# Altium PCB tyre_temps.PcbDoc
Units mm, origin at the board's own origin, x right, y up, seen from the top; angles counter-clockwise.
Board outline 19.3 x 107.95 mm, 2 copper layers (Component Side, Bottom Layer), stack 0.325 mm thick; 21 components, 20 nets, 123 pads, 39 vias.
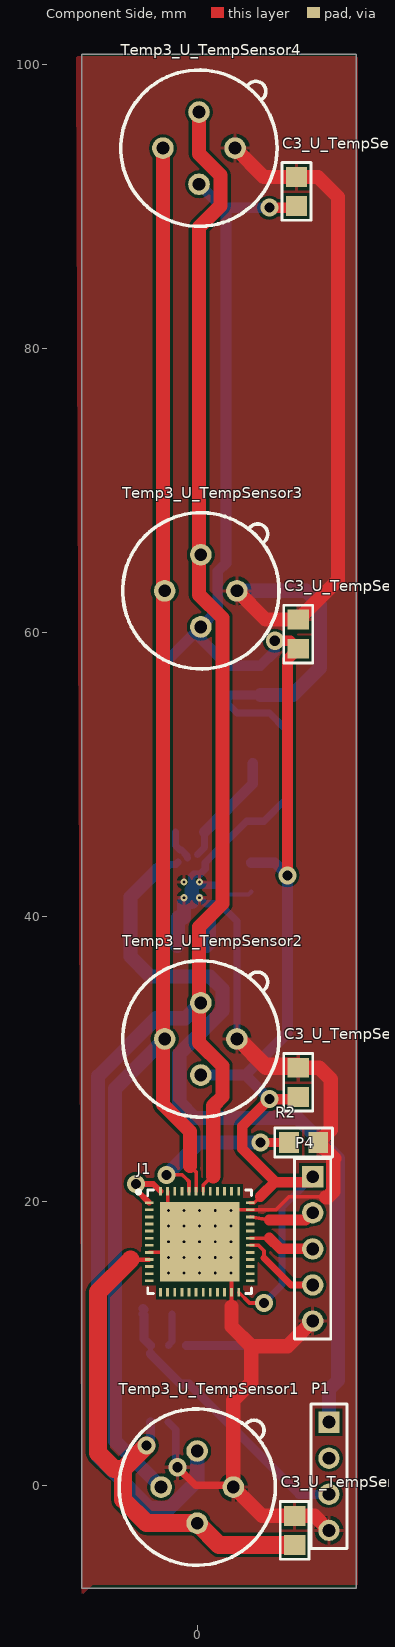
[diagram p0: Component Side view]
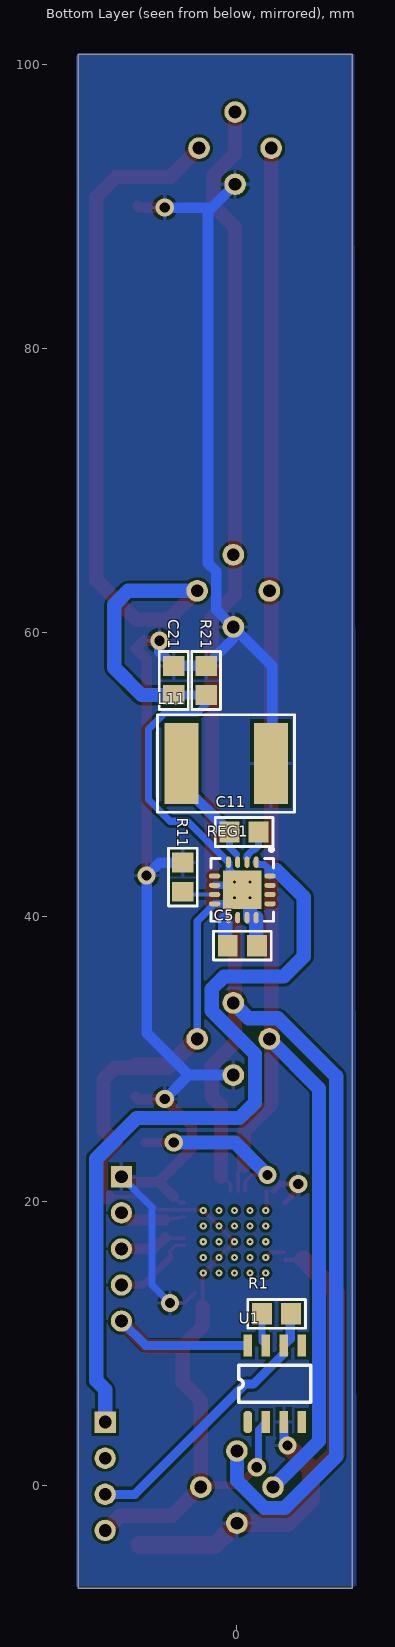
[diagram p1: Bottom Layer view, seen from below]

## Layer stack, top to bottom
Top Solder: solder mask 0.0102, Solder Resist, Dk 3.5
Component Side: signal copper 0.0356
Dielectric 1: core 0.254, FR-4, Dk 4.2
Bottom Layer: signal copper 0.0356
Solder Side: solder mask 0.0102, Solder Resist, Dk 3.5

## Board outline
-8.128,-7.239 11.176,-7.239 11.176,100.711 -8.128,100.711

## Design rules (kind name [scope] priority, off if disabled: settings)
Clearance [All] p1: gap=0.2
PolygonConnect [All] p1: connectstyle=Relief reliefconductorwidth=0.254 reliefentries=4 polygonreliefangle="90 Angle" airgapwidth=0.254
RoomDefinition U_CanTranceiver [InComponentClass('U_CanTranceiver')] p1: confinementstyle=ConfineIn formatcopy=TRUE lockcomponents=FALSE outline 0.127,14.215 0.127,3.429 -8.001,3.429 -8.001,14.215
RoomDefinition "U_Buck Converter" [InComponentClass('U_Buck Converter')] p2: confinementstyle=ConfineIn formatcopy=TRUE lockcomponents=FALSE outline 6.985,61.214 6.985,36.576 -5.715,36.576 -5.715,61.214
RoomDefinition U_TempSensor4 [InComponentClass('U_TempSensor4')] p3: confinementstyle=ConfineIn formatcopy=TRUE lockcomponents=FALSE outline -5.969,88.138 8.509,88.138 8.509,102.87 -5.969,102.87
RoomDefinition U_TempSensor3 [InComponentClass('U_TempSensor3')] p4: confinementstyle=ConfineIn formatcopy=TRUE lockcomponents=FALSE outline -5.842,57.023 8.636,57.023 8.636,71.755 -5.842,71.755
RoomDefinition U_TempSensor2 [InComponentClass('U_TempSensor2')] p5: confinementstyle=ConfineIn formatcopy=TRUE lockcomponents=FALSE outline -5.842,25.527 8.636,25.527 8.636,40.259 -5.842,40.259
RoomDefinition U_TempSensor1 [InComponentClass('U_TempSensor1')] p6: confinementstyle=ConfineIn formatcopy=TRUE lockcomponents=FALSE outline -6.096,-5.969 8.382,-5.969 8.382,8.763 -6.096,8.763
RoomDefinition U_Micro [InComponentClass('U_Micro')] p7: confinementstyle=ConfineIn formatcopy=TRUE lockcomponents=FALSE outline -8.846,8.249 10.077,8.249 10.077,25.4 -8.846,25.4
RoomDefinition "Top Level" [InComponentClass('Top Level')] p8: confinementstyle=ConfineIn formatcopy=TRUE lockcomponents=FALSE outline 10.668,7.62 7.62,7.62 7.62,-5.588 10.668,-5.588
RoutingVias [All] p1: holewidth=0.711 width=1.27 viastyle="Through Hole" minholewidth=0.711 minwidth=1.27 maxholewidth=0.711 maxwidth=1.27
SolderMaskExpansion [All] p1: expansion=0.102
Width [All] p1: maxlimit=2 minlimit=0.254 preferedwidth=1
30 further rules are at their usual default settings.

## Classes and differential pairs
component class "Top Level": P1
component class "U_Buck Converter": C5 C11 C21 L11 R11 R21 REG1
component class U_CanTranceiver: R1 U1
component class U_Micro: J1 P4 R2
component class U_TempSensor1: C3_U_TempSensor1 Temp3_U_TempSensor1
component class U_TempSensor2: C3_U_TempSensor2 Temp3_U_TempSensor2
component class U_TempSensor3: C3_U_TempSensor3 Temp3_U_TempSensor3
component class U_TempSensor4: C3_U_TempSensor4 Temp3_U_TempSensor4
channel class TempSensor: U_TempSensor1 U_TempSensor2 U_TempSensor3 U_TempSensor4

## Components (designator, comment, footprint, x,y, rotation, side; value= is the part's Value field where it differs from the comment)
C3_U_TempSensor1 "Cap" R0805 6.858,-3.175 r90 top (schematic designator C3)
C3_U_TempSensor2 "Cap" R0805 7.112,28.363 r90 top (schematic designator C3)
C3_U_TempSensor3 "Cap" R0805 7.112,59.902 r90 top (schematic designator C3)
C3_U_TempSensor4 "Cap" R0805 6.985,91.059 r90 top (schematic designator C3)
C5 "Cap" R0805 -0.381,37.973 r180 bottom
C11 "Cap" R0805 -0.508,45.974 r0 bottom
C21 "Cap" R0805 4.445,56.642 r90 bottom
J1 "STM32F072CBU6" "STM32F072CBU6 - duplicate" 0.171,17.139 r0 top
L11 "Inductor" INDUCTOR 0.762,50.8 r180 bottom
P1 "Header 4" HDR1X4 9.271,4.445 r270 top
P4 "Header 5" HDR1X5 8.128,21.717 r270 top
R1 "Res3" R0805 -2.794,12.065 r0 bottom
R2 "Res3" R0805 7.493,24.13 r0 top
R11 "Res3" R0805 3.81,42.799 r270 bottom
R21 "Res3" R0805 2.159,56.642 r90 bottom
REG1 "TPS54395" TPS54395 -0.381,41.901 r270 bottom
Temp3_U_TempSensor1 "Component_1" MLX90614 0,-0.127 r90 top (schematic designator Temp3)
Temp3_U_TempSensor2 "Component_1" MLX90614 0.254,31.411 r90 top (schematic designator Temp3)
Temp3_U_TempSensor3 "Component_1" MLX90614 0.254,62.95 r90 top (schematic designator Temp3)
Temp3_U_TempSensor4 "Component_1" MLX90614 0.127,94.107 r90 top (schematic designator Temp3)
U1 "CAN TRANCEIVER" SOP8 -0.762,4.445 r270 bottom

## Footprints (in the part's own frame and the unit in brackets; to place one, negate y for a bottom-side part, rotate by r counter-clockwise, add the part's x,y. Pads: shape width x height; smd on the part's side, far side on the other; paste and mask are expansions set on the pad)
HDR1X4 [mm] "Connector; Header; 4 Position"
  rect 1.5x1.5 hole 0.9: 1(0,0)
  round 1.5 hole 0.9: 2(2.54,0) 3(5.08,0) 4(7.62,0)
  silkscreen extent -1.27,-1.27 8.89,1.27
HDR1X5 [mm] "Connector; Header; 5 Position"
  rect 1.5x1.5 hole 0.9: 1(0,0)
  round 1.5 hole 0.9: 2(2.54,0) 3(5.08,0) 4(7.62,0) 5(10.16,0)
  silkscreen extent -1.27,-1.27 11.43,1.27
INDUCTOR [mm]
  rect 2.4x5.7 smd: 1(3.15,0) 2(-3.15,0)
  silkscreen extent -4.83,-3.43 4.83,3.43, body extent -3.15,-3.15 3.15,3.15, height 4.5
MLX90614 [mil]
  round 60 hole 35.43: 0(0,100) 1(100,0) 2(0,-100) 3(-100,0)
  silkscreen extent -216,-217 216,216
R0805 [mm]
  rect 1.4x1.5 smd: 1(-1.025,0) 2(1.025,0)
  silkscreen extent -2.03,-1.02 2.03,1.02, body extent -1.4,-0.76 1.4,0.76, height 1
SOP8 [mm]
  oct 1.55x0.6 smd: 1(0,0)
  rect 1.55x0.6 smd: 2(0,1.27) 3(0,2.54) 4(0,3.81) 5(-5.4,3.81) 6(-5.4,2.54) 7(-5.4,1.27) 8(-5.4,0)
  silkscreen extent -4,-0.63 -1.4,4.45, body extent -4.62,-0.62 -0.62,4.38, height 1.75
"STM32F072CBU6 - duplicate" [mm] "STMicroelectronics STM32F072CBU6, 32bit ARM Cortex M0 Microcontroller, 48MHz, 64 kB, 128 kB Flash, 48-Pin UFQFPN"
  rect 0.6x0.2 smd: 1(-3.55,2.75) 2(-3.55,2.25) 3(-3.55,1.75) 4(-3.55,1.25) 5(-3.55,0.75) 6(-3.55,0.25) 7(-3.55,-0.25) 8(-3.55,-0.75) 9(-3.55,-1.25) 10(-3.55,-1.75) 11(-3.55,-2.25) 12(-3.55,-2.75) 25(3.55,-2.75) 26(3.55,-2.25) 27(3.55,-1.75) 28(3.55,-1.25) 29(3.55,-0.75) 30(3.55,-0.25) 31(3.55,0.25) 32(3.55,0.75) 33(3.55,1.25) 34(3.55,1.75) 35(3.55,2.25) 36(3.55,2.75)
  rect 0.2x0.6 smd: 13(-2.75,-3.55) 14(-2.25,-3.55) 15(-1.75,-3.55) 16(-1.25,-3.55) 17(-0.75,-3.55) 18(-0.25,-3.55) 19(0.25,-3.55) 20(0.75,-3.55) 21(1.25,-3.55) 22(1.75,-3.55) 23(2.25,-3.55) 24(2.75,-3.55) 37(2.75,3.55) 38(2.25,3.55) 39(1.75,3.55) 40(1.25,3.55) 41(0.75,3.55) 42(0.25,3.55) 43(-0.25,3.55) 44(-0.75,3.55) 45(-1.25,3.55) 46(-1.75,3.55) 47(-2.25,3.55) 48(-2.75,3.55)
  rect 5.6x5.6 smd: 49(0,0)
  silkscreen extent -4.42,-3.65 3.65,3.65, body extent -3.5,-3.5 3.5,3.5, height 0.55
TPS54395 [mm] "QFN, 16-Leads, Body 4.00x4.00mm, Pitch 0.65mm, Thermal Pad 2.70x2.70mm, IPC Medium Density"
  oval 0.8x0.35 smd: 1(-1.95,0.975) 2(-1.95,0.325) 3(-1.95,-0.325) 4(-1.95,-0.975) 9(1.95,-0.975) 10(1.95,-0.325) 11(1.95,0.325) 12(1.95,0.975)
  oval 0.35x0.8 smd: 5(-0.975,-1.95) 6(-0.325,-1.95) 7(0.325,-1.95) 8(0.975,-1.95) 13(0.975,1.95) 14(0.325,1.95) 15(-0.325,1.95) 16(-0.975,1.95)
  rect 2.7x2.7 smd: 17(0,0)
  silkscreen extent -2.97,-2.2 2.2,2.2, body extent -2.13,-2.13 2.13,2.13, height 1

## Part data
C3_U_TempSensor1 C3_U_TempSensor2 C3_U_TempSensor3 C3_U_TempSensor4 C5 C11 C21: "Capacitor"
J1: "MICROCONTROLLER"
P1: "Header, 4-Pin"
P4: "Header, 5-Pin"
R1 R2 R11 R21: "Resistor"
REG1: "Dual Channel Buck Converter"
U1: library part 595-SN65HVD233

## Via types
v1: diameter 0.5, hole 0.2, Component Side to Bottom Layer, 29 vias
v2: diameter 1.27, hole 0.711, Component Side to Bottom Layer, 10 vias

## Nets (pads, with @x,y where several pads share a name; then routed paths per layer and width w, separated by ;. In a path a pad name is that pad's centre, name@x,y a point inside that pad or via, vN(x,y) a via of type N, cw(c..) or ccw(c..) an arc to the next point about the centre after c; other vN are vias at no path point)
"CAN H": P1.2
"CAN L": P1.3 R1.1 U1.6 | length 19.2
  Bottom Layer w0.635: R1.1 -3.755,12.001 -3.755,10.298 U1.6 ; R1.1@-3.819,12.437 R1.1@-3.755,12.373 ; U1.6@-3.302,9.271 -1.143,7.112 -0.569,7.112 7.178,-0.635 P1.3
"CAN RX": U1.4
"CAN RXM": J1.33
"CAN TX": U1.1
"CAN TXM": J1.32
GND: C3_U_TempSensor1.2 C3_U_TempSensor2.2 C3_U_TempSensor3.2 C3_U_TempSensor4.2 C5.2 C21.1 J1.8 J1.23 J1.35 J1.47 J1.49 P1.4 P4.5 R2.2 R21.1 REG1.4 REG1.6 REG1.8 REG1.11 REG1.12 REG1.17 Temp3_U_TempSensor1.2 Temp3_U_TempSensor2.2 Temp3_U_TempSensor3.2 Temp3_U_TempSensor4.2 U1.2 U1.8 | length 187.8
  Component Side w0.254: J1.8 -2.379,16.389 v1(-2.029,16.039) ; J1.47 -2.079,19.389 v1(-2.029,19.339) ; 2.413,12.573 2.413,13.581 J1.23 ; J1.49@2.421,14.889 v1(2.371,14.939) v1(1.271,16.039) v1(0.171,17.139) v1(1.271,18.239) v1(2.371,19.339) 2.421,19.389 J1.35 5.546,19.389 6.477,20.32 9.017,20.32
  Component Side w0.3: J1.23 J1.49@2.421,14.889
  Component Side w0.508: v2(-1.397,1.27) -0.127,0 2.413,0 Temp3_U_TempSensor1.2
  Component Side w1: 2.413,12.573 2.413,11.176 3.81,9.779 ; Temp3_U_TempSensor4.2 4.69,92.084 C3_U_TempSensor4.2 8.5,92.084 9.906,90.678 9.906,63.721 C3_U_TempSensor3.2 4.817,60.927 Temp3_U_TempSensor3.2 ; Temp3_U_TempSensor2.2 4.817,29.388 C3_U_TempSensor2.2 8.585,29.388 9.398,28.575 9.398,25.01 R2.2 9.652,22.996 9.578,22.922 9.578,20.677 9.168,20.267 9.089,20.267 ; Temp3_U_TempSensor2.2@2.794,31.623 4.817,29.6 C3_U_TempSensor2.2@7.112,29.6 ; P4.5 6.35,9.779 3.81,9.779 ; P1.4 8.246,-2.15 C3_U_TempSensor1.2 4.563,-2.15 Temp3_U_TempSensor1.2 2.54,5.969 3.81,7.239 3.81,9.779
  Bottom Layer w0.5: REG1.6 -0.056,42.226 REG1.17 ; R21.1 2.159,54.991 2.794,54.356 5.08,54.356 6.223,53.213 6.223,48.26 4.699,46.736 3.479,46.736 REG1.4 0.569,43.826 0.569,43.367 0.203,43.001 -0.256,43.001 -0.381,42.876 REG1.17 ; Temp3_U_TempSensor2.2 2.794,39.701 REG1.8 0.594,40.926 v1(0.169,41.351) REG1.17
  Bottom Layer w0.508: U1.2 -1.516,3.929 -1.516,1.389 v2(-1.397,1.27)
  Bottom Layer w0.635: U1.8 6.416,9.845 P4.5 ; R21.1 C21.1
  Bottom Layer w1: C5.2 -1.356,38.023 REG1.12 -0.931,39.951 -0.931,41.051 -0.381,41.051 REG1.17 ; Temp3_U_TempSensor3.2 7.662,62.95 8.636,61.976 8.636,57.531 6.722,55.617 C21.1
  other v1: -2.029,14.939 -0.929,14.939 0.171,14.939 1.271,14.939 -0.929,16.039 0.171,16.039 2.371,16.039 -2.029,17.139 -0.929,17.139 1.271,17.139 2.371,17.139 -2.029,18.239 -0.929,18.239 0.171,18.239 2.371,18.239 -0.929,19.339 0.171,19.339 1.271,19.339 -0.931,41.351 -0.931,42.451 0.169,42.451
NetC5_1: C5.1 REG1.9 | length 2
  Bottom Layer w1: C5.1 0.819,38.148 0.819,39.851
NetC11_1: C11.1 REG1.2 | length 2.2
  Bottom Layer w0.5: C11.1 -1.533,45.018 -1.216,44.701 -1.097,44.701 -0.731,44.335 -0.731,44.216 REG1.2@-0.681,44.166
NetC11_2: C11.2 L11.2 REG1.3 | length 8
  Bottom Layer w0.5: 0.019,44.385 0.517,44.883 C11.2
  Bottom Layer w0.75: C11.2 3.912,49.369 L11.2
NetJ1_44: J1.44 R2.1 | length 12
  Component Side w0.254: v2(-2.159,21.844) -1.043,21.844 -0.851,21.652 -0.849,21.652 -0.579,21.382 J1.44
  Component Side w0.635: v2(4.445,24.13) R2.1
  Bottom Layer w1: v2(-2.159,21.844) 0.127,24.13 v2(4.445,24.13)
NetR1_2: R1.2 U1.7 | length 2.3
  Bottom Layer w0.5: U1.7 -1.769,10.108 R1.2
NetR11_2: R11.2 REG1.7 | length 2.3
  Bottom Layer w0.3: REG1.7 3.612,41.576 R11.2
NRST: J1.34 P4.2 | length 4.6
  Component Side w0.254: J1.34 5.08,18.669
  Component Side w0.75: 5.08,18.669 7.62,18.669 P4.2
SCL: J1.42 Temp3_U_TempSensor1.1 Temp3_U_TempSensor2.1 Temp3_U_TempSensor3.1 Temp3_U_TempSensor4.1 | length 127.3
  Component Side w0.254: J1.42@0.429,20.689 0.429,21.136 1.036,21.743 1.127,21.743
  Component Side w1: Temp3_U_TempSensor4.1 0.127,93.711 1.643,92.195 1.643,90.051 0.127,88.535 0.127,62.681 1.77,61.038 1.77,40.944 0.127,39.301 0.127,31.142 1.77,29.499 1.77,27.355 1.127,26.712 1.127,21.743
  Bottom Layer w1: Temp3_U_TempSensor1.1 0,0.345 -1.934,-1.589 -3.364,-1.589 -6.985,2.032 -6.985,28.78 -2.892,32.873 -0.824,32.873 Temp3_U_TempSensor2.1
SDA: J1.43 Temp3_U_TempSensor1.0 Temp3_U_TempSensor2.0 Temp3_U_TempSensor3.0 Temp3_U_TempSensor4.0 | length 108.7
  Component Side w0.254: -0.508,22.479 -0.079,22.05 J1.43
  Component Side w1: Temp3_U_TempSensor4.0 -2.413,26.797 -0.508,24.892 -0.508,22.479
  Bottom Layer w1: Temp3_U_TempSensor1.0 -5.785,3.118 -5.785,27.912 Temp3_U_TempSensor2.0
SWCLK: J1.30 P4.4 | length 5.9
  Component Side w0.254: J1.30 4.32,16.889 4.699,16.51 4.699,16.002
  Component Side w0.5: 4.699,16.002 6.604,14.097 P4.4
SWDIO: J1.31 P4.3 | length 4.7
  Component Side w0.254: J1.31 5.07,17.389 5.08,17.399
  Component Side w0.75: 5.08,17.399 5.842,16.637 P4.3
VBATT: P1.1 REG1.1 REG1.16 | length 56.8
  Bottom Layer w0.5: REG1.16 -2.181,43.026 -2.181,43.437 -1.917,43.701 -1.506,43.701 REG1.1
  Bottom Layer w1: -2.794,43.307 -4.699,41.402 -4.699,37.211 -3.302,35.814 0.889,35.814 1.778,34.925 1.778,33.393 -1.27,30.345 -1.27,26.924 -0.189,25.843 7.05,25.843 9.906,22.987 9.906,7.366 9.271,6.731 P1.1
VCC_3_3V: C3_U_TempSensor1.1 C3_U_TempSensor2.1 C3_U_TempSensor3.1 C3_U_TempSensor4.1 C21.2 J1.1 J1.9 J1.24 J1.36 J1.48 L11.1 P4.1 R11.1 R21.2 Temp3_U_TempSensor1.3 Temp3_U_TempSensor2.3 Temp3_U_TempSensor3.3 Temp3_U_TempSensor4.3 U1.3 | length 166.4
  Component Side w0.254: J1.24 3.683,12.827 v2(4.699,12.827)
  Component Side w0.26: v2@-4.318,20.828 v2(-4.318,21.209) ; J1.36 4.014,19.889 4.445,20.32
  Component Side w0.3: -4.699,15.875 -3.393,15.875 J1.9
  Component Side w0.4: v2@-4.318,20.828 J1.1 ; v2(-4.318,21.209) -3.099,21.209 J1.48
  Component Side w0.75: 4.445,20.32 5.494,21.369 3.175,23.689 3.175,25.273 v2(5.08,27.178) 6.952,27.178 C3_U_TempSensor2.1 ; v2(5.08,89.916) 6.867,89.916 C3_U_TempSensor4.1 ; v2(5.461,59.436) 6.553,59.436 C3_U_TempSensor3.1 6.35,58.115 v2(6.35,42.926) ; 5.715,21.336 P4.1@8.001,21.336
  Component Side w1.27: -4.699,15.875 -6.985,13.589 -6.985,2.286 -5.842,1.143 -5.207,1.143 ; v2(-3.556,2.794) -5.207,1.143 ; C3_U_TempSensor1.1 1.533,-4.2 Temp3_U_TempSensor1.3 -3.556,-2.667 -5.207,-1.016 -5.207,1.143
  Bottom Layer w0.5: v2(4.699,12.827) 5.969,14.097 5.969,19.558 P4.1
  Bottom Layer w0.635: v2(-3.556,2.794) -3.302,3.048 U1.3
  Bottom Layer w0.75: L11.1 -2.498,50.91 -2.498,57.658 Temp3_U_TempSensor3.3 ; Temp3_U_TempSensor4.3 1.778,89.916 ; Temp3_U_TempSensor2.3 3.387,28.871 ; R11.1 5.452,43.824 v2(6.35,42.926) 6.35,31.835 3.387,28.871 ; v2(5.08,27.178) 3.387,28.871 ; v2(5.08,89.916) 2.032,89.916 2.032,64.897 1.457,64.322 1.457,61.613 Temp3_U_TempSensor3.3 ; v2(5.461,59.436) 5.461,58.683 C21.2 R21.2 0.254,59.572 Temp3_U_TempSensor3.3
pads on no net: J1.2 J1.3 J1.4 J1.5 J1.6 J1.7 J1.10 J1.11 J1.12 J1.13 J1.14 J1.15 J1.16 J1.17 J1.18 J1.19 J1.20 J1.21 J1.22 J1.25 J1.26 J1.27 J1.28 J1.29 J1.37 J1.38 J1.39 J1.40 J1.41 J1.45 J1.46 REG1.5 REG1.10 REG1.13 REG1.14 REG1.15 U1.5

## Polygon pours and split planes (outlines as drawn)
VCC_3_3V on Bottom Layer "Top Layer-No Net" (solid, pour order 4): -8.255,100.711 11.176,100.711 11.303,100.584 11.303,-7.112 -8.382,-7.112
GND on Component Side "Top Layer-No Net" (solid, pour order 6): -8.509,100.584 11.176,100.584 11.303,100.457 11.303,-6.985 -7.366,-6.985 -8.128,-7.747